# Altium PCB SPT3G_LCTestBoard.PcbDoc (part 3 of 3)
Units mil, origin at the board's own origin, x right, y up, seen from the top; angles counter-clockwise.
Board outline 4083.5 x 1969 mil, 6 copper layers (Top Layer, Signal Layer 1, Internal Plane 1, Internal Plane 2, Signal Layer 2, Bottom Layer), stack 61.6 mil thick; 146 components, 265 nets, 634 pads, 264 vias.
Unrouted connection lines stored in the file: 59.
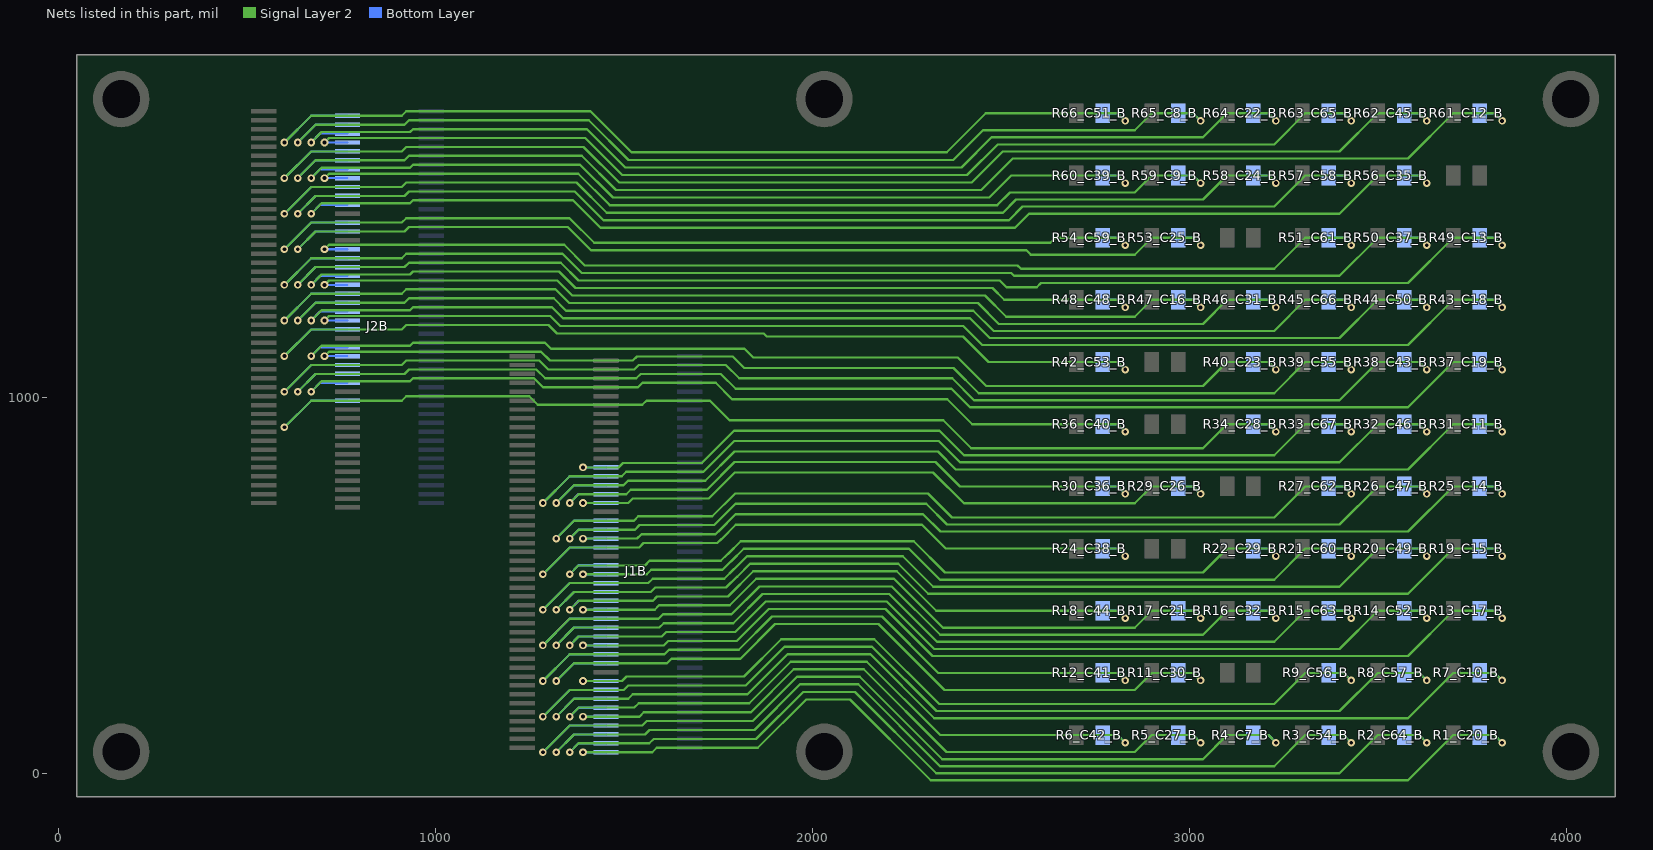
[diagram p7: the nets of this part, all layers, seen from the top]

## Via types
v1: diameter 20, hole 10, Top Layer to Bottom Layer, 264 vias

## Nets (pads, with @x,y where several pads share a name; then routed paths per layer and width w, separated by ;. In a path a pad name is that pad's centre, name@x,y a point inside that pad or via, vN(x,y) a via of type N, cw(c..) or ccw(c..) an arc to the next point about the centre after c; other vN are vias at no path point) (continued)
RETFREQB7: J1B.7 R4_C7_B.2 | length 2418.1
  Signal Layer 2 w6: v1(1284.57,57.68) 1355.43,128.54 1548.21,128.54 1560.02,140.36 1841.18,140.36 1958.59,257.77 1980,257.77 2125.56,257.77 2343.95,39.38 2615,39.38 3036.25,39.38 3100,103.13 3209.85,103.13 v1(3229.85,83.13)
  Bottom Layer w6: v1(1284.57,57.68) 1355.43,128.54 J1B.7@1451.89,128.54 ; R4_C7_B.2@3170,103.13 3209.85,103.13 v1(3229.85,83.13)
RETFREQB8: J2B.87 R65_C8_B.2 | length 2743
  Signal Layer 2 w6: v1(634.01,1675.79) 681.26,1723.03 917.36,1723.03 929.17,1734.84 1406.35,1734.84 1511.64,1629.56 1980,1629.56 2373.76,1629.56 2452.33,1708.13 2645,1708.13 2855,1708.13 2900,1753.13 3009.85,1753.13 v1(3029.85,1733.13)
  Bottom Layer w6: v1(634.01,1675.79) 681.26,1723.03 J2B.87@765.9,1723.03 ; R65_C8_B.2@2970,1753.13 3009.85,1753.13 v1(3029.85,1733.13)
RETFREQB9: J2B.75 R59_C9_B.2 | length 2534.5
  Signal Layer 2 w6: v1(704.88,1581.3) 716.69,1593.11 1378.38,1593.11 1461.93,1509.56 1980,1509.56 2490.35,1509.56 2523.91,1543.13 2645,1543.13 2855,1543.13 2900,1588.13 3009.85,1588.13 v1(3029.85,1568.13)
  Bottom Layer w6: v1(704.88,1581.3) J2B.75@765.9,1581.3 ; R59_C9_B.2@2970,1588.13 3009.85,1588.13 v1(3029.85,1568.13)
RETFREQB10: J1B.13 R7_C10_B.2 | length 2926.3
  Signal Layer 2 w6: v1(1320,152.17) 1367.24,199.41 1511.31,199.41 1523.12,211.22 1827.19,211.22 1933.74,317.77 1980,317.77 2153.72,317.77 2323.36,148.13 2606,148.13 3580,148.13 3700,268.13 3809.85,268.13 v1(3829.85,248.13)
  Bottom Layer w6: v1(1320,152.17) 1367.24,199.41 J1B.13@1451.89,199.41 ; R7_C10_B.2@3770,268.13 3809.85,268.13 v1(3829.85,248.13)
RETFREQB11: J1B.61 R31_C11_B.2 | length 2863.6
  Signal Layer 2 w6: v1(1320,719.1) 1367.24,766.34 1498.4,766.34 1510.21,778.15 1715.3,778.15 1792.72,855.57 1980,855.57 2332.88,855.57 2380.32,808.13 2606,808.13 3580,808.13 3700,928.13 3809.85,928.13 v1(3829.85,908.13)
  Bottom Layer w6: v1(1320,719.1) 1367.24,766.34 J1B.61@1451.89,766.34 ; R31_C11_B.2@3770,928.13 3809.85,928.13 v1(3829.85,908.13)
RETFREQB12: J2B.79 R61_C12_B.2 | length 3570.1
  Signal Layer 2 w6: v1(634.01,1581.3) 681.26,1628.54 917.36,1628.54 929.17,1640.36 1387.71,1640.36 1478.5,1549.56 1980,1549.56 2447.59,1549.56 2531.15,1633.13 2606,1633.13 3580,1633.13 3700,1753.13 3809.85,1753.13 v1(3829.85,1733.13)
  Bottom Layer w6: v1(634.01,1581.3) 681.26,1628.54 J2B.79@765.9,1628.54 ; R61_C12_B.2@3770,1753.13 3809.85,1753.13 v1(3829.85,1733.13)
RETFREQB13: J2B.55 R49_C13_B.2 | length 3529.5
  Signal Layer 2 w6: v1(634.01,1297.84) 681.26,1345.08 917.36,1345.08 929.17,1356.89 1331.76,1356.89 1379.09,1309.56 1980,1309.56 2496.89,1309.56 2514.61,1291.84 2594.71,1291.84 2606,1303.13 3580,1303.13 3700,1423.13 3809.85,1423.13 v1(3829.85,1403.13)
  Bottom Layer w6: v1(634.01,1297.84) 681.26,1345.08 J2B.55@765.9,1345.08 ; R49_C13_B.2@3770,1423.13 3809.85,1423.13 v1(3829.85,1403.13)
RETFREQB14: J1B.49 R25_C14_B.2 | length 2671.8
  Signal Layer 2 w6: v1(1390.86,624.61) 1534.11,624.61 1545.92,636.42 1742.67,636.42 1749.91,643.66 1750.52,643.66 1795.89,689.03 1980,689.03 2293.41,689.03 2339.32,643.13 2606,643.13 3580,643.13 3700,763.13 3809.85,763.13 v1(3829.85,743.13)
  Bottom Layer w6: v1(1390.86,624.61) J1B.49@1451.89,624.61 ; R25_C14_B.2@3770,763.13 3809.85,763.13 v1(3829.85,743.13)
RETFREQB15: J1B.37 R19_C15_B.2 | length 2871
  Signal Layer 2 w6: v1(1320,435.63) 1367.24,482.88 1570.7,482.88 1582.51,494.69 1770.64,494.69 1799.62,523.66 1800.23,523.66 1834.33,557.77 1980,557.77 2227.67,557.77 2307.31,478.13 2606,478.13 3580,478.13 3700,598.13 3809.85,598.13 v1(3829.85,578.13)
  Bottom Layer w6: v1(1320,435.63) 1367.24,482.88 J1B.37@1451.89,482.88 ; R19_C15_B.2@3770,598.13 3809.85,598.13 v1(3829.85,578.13)
RETFREQB16: J2B.51 R47_C16_B.2 | length 2525.9
  Signal Layer 2 w6: v1(704.88,1297.84) 716.69,1309.65 1322.44,1309.65 1362.52,1269.56 1980,1269.56 2457.73,1269.56 2514.16,1213.13 2645,1213.13 2855,1213.13 2900,1258.13 3009.85,1258.13 v1(3029.85,1238.13)
  Bottom Layer w6: v1(704.88,1297.84) J2B.51@765.9,1297.84 ; R47_C16_B.2@2970,1258.13 3009.85,1258.13 v1(3029.85,1238.13)
RETFREQB17: J1B.25 R13_C17_B.2 | length 2717.8
  Signal Layer 2 w6: v1(1390.86,341.14) 1605.41,341.14 1617.22,352.95 1799.22,352.95 1884.04,437.77 1980,437.77 2193.84,437.77 2318.48,313.13 2606,313.13 3580,313.13 3700,433.13 3809.85,433.13 v1(3829.85,413.13)
  Bottom Layer w6: v1(1390.86,341.14) J1B.25@1451.89,341.14 ; R13_C17_B.2@3770,433.13 3809.85,433.13 v1(3829.85,413.13)
RETFREQB18: J2B.43 R43_C18_B.2 | length 4100.4
  Signal Layer 2 w6: v1(704.88,1203.35) 716.69,1215.16 1303.79,1215.16 1330.31,1188.64 1500.57,1188.64 1806.24,1188.78 ; 1500.79,1188.86 1707.47,1188.86 1806.24,1188.78 ; 1707.69,1188.64 1980,1188.64 ; 1980,1188.86 1806.24,1188.78 ; v1(3829.85,1238.13) 3809.85,1258.13 3700,1258.13 3580,1138.13 2606,1138.13 2450.63,1138.13 2400.11,1188.64 1980,1188.64 ; 1806.24,1188.78 1980,1188.64
  Bottom Layer w6: v1(704.88,1203.35) J2B.43@765.9,1203.35 ; R43_C18_B.2@3770,1258.13 3809.85,1258.13 v1(3829.85,1238.13)
RETFREQB19: J2B.31 R37_C19_B.2 | length 3549.2
  Signal Layer 2 w6: v1(634.01,1014.37) 681.26,1061.62 917.36,1061.62 929.17,1073.43 1266.83,1073.43 1290.46,1049.8 1532.35,1049.8 1544.16,1061.62 1756.56,1061.62 1796.07,1022.1 1980,1022.1 2368.74,1022.1 2417.72,973.13 2606,973.13 3580,973.13 3700,1093.13 3809.85,1093.13 v1(3829.85,1073.13)
  Bottom Layer w6: v1(634.01,1014.37) 681.26,1061.62 J2B.31@765.9,1061.62 ; R37_C19_B.2@3770,1093.13 3809.85,1093.13 v1(3829.85,1073.13)
RETFREQB20: J1B.1 R1_C20_B.2 | length 2773.1
  Signal Layer 2 w6: v1(1390.86,57.68) 1574.73,57.68 1586.29,69.24 1854.92,69.24 1983.45,197.77 2099.2,197.77 2313.84,-16.87 3580,-16.87 3700,103.13 3809.85,103.13 v1(3829.85,83.13)
  Bottom Layer w6: v1(1390.86,57.68) J1B.1@1451.89,57.68 ; R1_C20_B.2@3770,103.13 3809.85,103.13 v1(3829.85,83.13)
RETFREQB21: J1B.33 R17_C21_B.2 | length 1882.8
  Signal Layer 2 w6: v1(1390.86,435.63) 1581.05,435.63 1592.86,447.44 1780.57,447.44 1850.9,517.77 1980,517.77 2216.39,517.77 2346.03,388.13 2645,388.13 2855,388.13 2900,433.13 3009.85,433.13 v1(3029.85,413.13)
  Bottom Layer w6: v1(1390.86,435.63) J1B.33@1451.89,435.63 ; R17_C21_B.2@2970,433.13 3009.85,433.13 v1(3029.85,413.13)
RETFREQB22: J2B.85 R64_C22_B.2 | length 2859.3
  Signal Layer 2 w6: v1(669.45,1675.79) 697.01,1703.35 931.79,1703.35 939.67,1711.22 1401.69,1711.22 1503.35,1609.56 1980,1609.56 2395.14,1609.56 2474.96,1689.38 2615,1689.38 3036.25,1689.38 3100,1753.13 3209.85,1753.13 v1(3229.85,1733.13)
  Bottom Layer w6: v1(669.45,1675.79) 693.07,1699.41 J2B.85@765.9,1699.41 ; R64_C22_B.2@3170,1753.13 3209.85,1753.13 v1(3229.85,1733.13)
RETFREQB23: J2B.37 R40_C23_B.2 | length 2831.7
  Signal Layer 2 w6: v1(669.45,1108.86) 697.01,1136.42 931.79,1136.42 939.67,1144.29 1290.12,1144.29 1305.77,1128.64 1819.55,1128.64 1842.82,1105.37 1980,1105.37 2385.33,1105.37 2461.32,1029.38 2615,1029.38 3036.25,1029.38 3100,1093.13 3209.85,1093.13 v1(3229.85,1073.13)
  Bottom Layer w6: v1(669.45,1108.86) 693.07,1132.48 J2B.37@765.9,1132.48 ; R40_C23_B.2@3170,1093.13 3209.85,1093.13 v1(3229.85,1073.13)
RETFREQB24: J2B.73 R58_C24_B.2 | length 3012.5
  Signal Layer 2 w6: v1(598.58,1486.81) 669.45,1557.68 910.13,1557.68 921.94,1569.49 1373.72,1569.49 1453.65,1489.56 1980,1489.56 2505.43,1489.56 2540.25,1524.38 2615,1524.38 3036.25,1524.38 3100,1588.13 3209.85,1588.13 v1(3229.85,1568.13)
  Bottom Layer w6: v1(598.58,1486.81) 669.45,1557.68 J2B.73@765.9,1557.68 ; R58_C24_B.2@3170,1588.13 3209.85,1588.13 v1(3229.85,1568.13)
RETFREQB25: J2B.63 R53_C25_B.2 | length 2697.2
  Signal Layer 2 w6: v1(634.01,1392.32) 681.26,1439.57 917.36,1439.57 929.17,1451.38 1350.41,1451.38 1412.22,1389.56 1980,1389.56 2568.02,1389.56 2579.45,1378.13 2645,1378.13 2855,1378.13 2900,1423.13 3009.85,1423.13 v1(3029.85,1403.13)
  Bottom Layer w6: v1(634.01,1392.32) 681.26,1439.57 J2B.63@765.9,1439.57 ; R53_C25_B.2@2970,1423.13 3009.85,1423.13 v1(3029.85,1403.13)
RETFREQB26: J1B.57 R29_C26_B.2 | length 1862.5
  Signal Layer 2 w6: v1(1390.86,719.1) 1511.22,719.1 1523.03,730.91 1724.63,730.91 1793.78,800.06 1980,800.06 2320.02,800.06 2401.95,718.13 2645,718.13 2855,718.13 2900,763.13 3009.85,763.13 v1(3029.85,743.13)
  Bottom Layer w6: v1(1390.86,719.1) J1B.57@1451.89,719.1 ; R29_C26_B.2@2970,763.13 3009.85,763.13 v1(3029.85,743.13)
RETFREQB27: J1B.9 R5_C27_B.2 | length 1938.1
  Signal Layer 2 w6: v1(1390.86,152.17) 1540.6,152.17 1552.41,163.98 1836.52,163.98 1950.31,277.77 1980,277.77 2136.14,277.77 2355.79,58.13 2645,58.13 2855,58.13 2900,103.13 3009.85,103.13 v1(3029.85,83.13)
  Bottom Layer w6: v1(1390.86,152.17) J1B.9@1451.89,152.17 ; R5_C27_B.2@2970,103.13 3009.85,103.13 v1(3029.85,83.13)
RETFREQB28: J2B.25 R34_C28_B.2 | length 3031.6
  Signal Layer 2 w6: v1(598.58,919.88) 669.45,990.75 910.13,990.75 921.94,1002.56 1247.94,1002.56 1270.98,979.52 1548.24,979.52 1559.47,990.75 1727.84,990.75 1779.75,938.84 1980,938.84 2346.76,938.84 2421.22,864.38 2615,864.38 3036.25,864.38 3100,928.13 3209.85,928.13 v1(3229.85,908.13)
  Bottom Layer w6: v1(598.58,919.88) 669.45,990.75 J2B.25@765.9,990.75 ; R34_C28_B.2@3170,928.13 3209.85,928.13 v1(3229.85,908.13)
RETFREQB29: J1B.43 R22_C29_B.2 | length 2154.3
  Signal Layer 2 w6: v1(1355.43,530.12) 1378.54,553.23 1555.23,553.23 1567.55,565.55 1756.65,565.55 1774.77,583.66 1775.37,583.66 1809.48,617.77 1980,617.77 2268.42,617.77 2351.81,534.38 2615,534.38 3036.25,534.38 3100,598.13 3209.85,598.13 v1(3229.85,578.13)
  Bottom Layer w6: v1(1355.43,530.12) 1379.05,553.74 J1B.43@1451.89,553.74 ; R22_C29_B.2@3170,598.13 3209.85,598.13 v1(3229.85,578.13)
RETFREQB30: J1B.21 R11_C30_B.2 | length 2091.3
  Signal Layer 2 w6: v1(1320,246.66) 1367.24,293.9 1614,293.9 1625.81,305.71 1808.55,305.71 1900.6,397.77 1980,397.77 2175.37,397.77 2350.01,223.13 2645,223.13 2855,223.13 2900,268.13 3009.85,268.13 v1(3029.85,248.13)
  Bottom Layer w6: v1(1320,246.66) 1367.24,293.9 J1B.21@1451.89,293.9 ; R11_C30_B.2@2970,268.13 3009.85,268.13 v1(3029.85,248.13)
RETFREQB31: J2B.49 R46_C31_B.2 | length 3003
  Signal Layer 2 w6: v1(598.58,1203.35) 669.45,1274.21 910.13,1274.21 921.94,1286.02 1317.77,1286.02 1354.24,1249.56 1980,1249.56 2439.04,1249.56 2494.23,1194.38 2615,1194.38 3036.25,1194.38 3100,1258.13 3209.85,1258.13 v1(3229.85,1238.13)
  Bottom Layer w6: v1(598.58,1203.35) 669.45,1274.21 J2B.49@765.9,1274.21 ; R46_C31_B.2@3170,1258.13 3209.85,1258.13 v1(3229.85,1238.13)
RETFREQB32: J1B.31 R16_C32_B.2 | length 2362.8
  Signal Layer 2 w6: v1(1284.57,341.14) 1355.31,411.88 1591.19,411.88 1603.06,423.76 1785.17,423.76 1859.18,497.77 1980,497.77 2210.3,497.77 2338.7,369.38 2615,369.38 3036.25,369.38 3100,433.13 3209.85,433.13 v1(3229.85,413.13)
  Bottom Layer w6: v1(1284.57,341.14) 1355.43,412.01 J1B.31@1451.89,412.01 ; R16_C32_B.2@3170,433.13 3209.85,433.13 v1(3229.85,413.13)
RETFREQB35: J2B.69 R56_C35_B.2 | length 3245.2
  Signal Layer 2 w6: v1(669.45,1486.81) 697.01,1514.37 931.79,1514.37 939.67,1522.25 1364.39,1522.25 1437.08,1449.56 1980,1449.56 2537.4,1449.56 2574.71,1486.88 2605,1486.88 3398.75,1486.88 3500,1588.13 3609.85,1588.13 v1(3629.85,1568.13)
  Bottom Layer w6: v1(669.45,1486.81) 693.07,1510.43 J2B.69@765.9,1510.43 ; R56_C35_B.2@3570,1588.13 3609.85,1588.13 v1(3629.85,1568.13)
RETFREQB36: J1B.59 R30_C36_B.2 | length 1728.9
  Signal Layer 2 w6: v1(1355.43,719.1) 1378.95,742.61 1505.84,742.61 1517.76,754.53 1719.97,754.53 1793.25,827.81 1980,827.81 2326.45,827.81 2391.13,763.13 2645,763.13 2809.85,763.13 v1(2829.85,743.13)
  Bottom Layer w6: v1(1355.43,719.1) 1379.05,742.72 J1B.59@1451.89,742.72 ; R30_C36_B.2@2770,763.13 2809.85,763.13 v1(2829.85,743.13)
RETFREQB37: J2B.57 R50_C37_B.2 | length 3404.8
  Signal Layer 2 w6: v1(598.58,1297.84) 669.45,1368.7 910.13,1368.7 921.94,1380.51 1336.42,1380.51 1387.37,1329.56 1980,1329.56 2527.26,1329.56 2534.95,1321.88 2605,1321.88 3398.75,1321.88 3500,1423.13 3609.85,1423.13 v1(3629.85,1403.13)
  Bottom Layer w6: v1(598.58,1297.84) 669.45,1368.7 J2B.57@765.9,1368.7 ; R50_C37_B.2@3570,1423.13 3609.85,1423.13 v1(3629.85,1403.13)
RETFREQB38: J1B.47 R24_C38_B.2 | length 1898.9
  Signal Layer 2 w6: v1(1284.56,530.12) 1355.43,600.99 1539.9,600.99 1551.71,612.8 1747.33,612.8 1758.2,623.66 1758.8,623.66 1796.42,661.28 1980,661.28 2290.58,661.28 2353.73,598.13 2645,598.13 2809.85,598.13 v1(2829.85,578.13)
  Bottom Layer w6: v1(1284.56,530.12) 1355.43,600.99 J1B.47@1451.89,600.99 ; R24_C38_B.2@2770,598.13 2809.85,598.13 v1(2829.85,578.13)
RETFREQB39: J2B.77 R60_C39_B.2 | length 2418.1
  Signal Layer 2 w6: v1(669.45,1581.3) 697.01,1608.86 931.79,1608.86 939.67,1616.73 1383.04,1616.73 1470.21,1529.56 1980,1529.56 2468.97,1529.56 2527.53,1588.13 2645,1588.13 2809.85,1588.13 v1(2829.85,1568.13)
  Bottom Layer w6: v1(669.45,1581.3) 693.07,1604.92 J2B.77@765.9,1604.92 ; R60_C39_B.2@2770,1588.13 2809.85,1588.13 v1(2829.85,1568.13)
RETFREQB40: J2B.29 R36_C40_B.2 | length 2418
  Signal Layer 2 w6: v1(669.45,1014.37) 697.01,1041.93 931.79,1041.93 939.67,1049.8 1261.04,1049.8 1284.74,1026.1 1536.74,1026.1 1548.63,1037.99 1742.88,1037.99 1786.53,994.35 1980,994.35 2357.82,994.35 2424.04,928.13 2645,928.13 2809.85,928.13 v1(2829.85,908.13)
  Bottom Layer w6: v1(669.45,1014.37) 693.07,1037.99 J2B.29@765.9,1037.99 ; R36_C40_B.2@2770,928.13 2809.85,928.13 v1(2829.85,908.13)
RETFREQB41: J1B.23 R12_C41_B.2 | length 1951.2
  Signal Layer 2 w6: v1(1284.57,246.66) 1355.43,317.52 1607.27,317.52 1619.08,329.33 1803.88,329.33 1892.32,417.77 1980,417.77 2184.15,417.77 2333.8,268.13 2645,268.13 2809.85,268.13 v1(2829.85,248.13)
  Bottom Layer w6: v1(1284.57,246.66) 1355.43,317.52 J1B.23@1451.89,317.52 ; R12_C41_B.2@2770,268.13 2809.85,268.13 v1(2829.85,248.13)
RETFREQB42: J1B.11 R6_C42_B.2 | length 1798
  Signal Layer 2 w6: v1(1355.43,152.17) 1379.34,176.08 1527.14,176.08 1538.66,187.6 1831.86,187.6 1942.03,297.77 1980,297.77 2144.03,297.77 2338.67,103.13 2645,103.13 2809.85,103.13 v1(2829.85,83.13)
  Bottom Layer w6: v1(1355.43,152.17) 1379.05,175.79 J1B.11@1451.89,175.79 ; R6_C42_B.2@2770,103.13 2809.85,103.13 v1(2829.85,83.13)
RETFREQB43: J2B.33 R38_C43_B.2 | length 3433.9
  Signal Layer 2 w6: v1(598.58,1014.37) 669.45,1085.24 910.13,1085.24 921.94,1097.05 1275.03,1097.05 1298.65,1073.43 1527.08,1073.43 1538.89,1085.24 1769.88,1085.24 1805.25,1049.86 1980,1049.86 2370.67,1049.86 2428.66,991.88 2605,991.88 3398.75,991.88 3500,1093.13 3609.85,1093.13 v1(3629.85,1073.13)
  Bottom Layer w6: v1(598.58,1014.37) 669.45,1085.24 J2B.33@765.9,1085.24 ; R38_C43_B.2@3570,1093.13 3609.85,1093.13 v1(3629.85,1073.13)
RETFREQB44: J1B.35 R18_C44_B.2 | length 1742.4
  Signal Layer 2 w6: v1(1355.43,435.63) 1379.56,459.76 ; 1379.77,459.97 1576.42,459.97 1587.57,471.12 1775.97,471.12 1842.61,537.77 1980,537.77 2223.38,537.77 2328.02,433.13 2645,433.13 2809.85,433.13 v1(2829.85,413.13)
  Bottom Layer w6: v1(1355.43,435.63) 1379.05,459.25 J1B.35@1451.89,459.25 ; R18_C44_B.2@2770,433.13 2809.85,433.13 v1(2829.85,413.13)
RETFREQB45: J2B.81 R62_C45_B.2 | length 3453.8
  Signal Layer 2 w6: v1(598.58,1581.3) 669.45,1652.17 910.13,1652.17 921.94,1663.98 1392.37,1663.98 1486.78,1569.56 1980,1569.56 2422.61,1569.56 2504.92,1651.88 2605,1651.88 3398.75,1651.88 3500,1753.13 3609.85,1753.13 v1(3629.85,1733.13)
  Bottom Layer w6: v1(598.58,1581.3) 669.45,1652.17 J2B.81@765.9,1652.17 ; R62_C45_B.2@3570,1753.13 3609.85,1753.13 v1(3629.85,1733.13)
RETFREQB46: J1B.63 R32_C46_B.2 | length 2751.7
  Signal Layer 2 w6: v1(1284.57,719.1) 1355.43,789.96 1493.97,789.96 1505.78,801.77 1674.33,801.77 1710.64,801.77 1792.19,883.32 1980,883.32 2334.81,883.32 2391.25,826.88 2605,826.88 3398.75,826.88 3500,928.13 3609.85,928.13 v1(3629.85,908.13)
  Bottom Layer w6: v1(1284.57,719.1) 1355.43,789.96 J1B.63@1451.89,789.96 ; R32_C46_B.2@3570,928.13 3609.85,928.13 v1(3629.85,908.13)
RETFREQB47: J1B.51 R26_C47_B.2 | length 2559.9
  Signal Layer 2 w6: v1(1355.43,624.61) 1379.11,648.29 1528.74,648.29 1540.91,660.45 1739.02,660.45 1795.36,716.79 1980,716.79 2301.64,716.79 2356.55,661.88 2605,661.88 3398.75,661.88 3500,763.13 3609.85,763.13 v1(3629.85,743.13)
  Bottom Layer w6: v1(1355.43,624.61) 1379.05,648.23 J1B.51@1451.89,648.23 ; R26_C47_B.2@3570,763.13 3609.85,763.13 v1(3629.85,743.13)
RETFREQB48: J2B.53 R48_C48_B.2 | length 2388.9
  Signal Layer 2 w6: v1(669.45,1297.84) 697.01,1325.39 931.79,1325.39 939.67,1333.27 1327.1,1333.27 1370.8,1289.56 1980,1289.56 2477.31,1289.56 2508.74,1258.13 2645,1258.13 2809.85,1258.13 v1(2829.85,1238.13)
  Bottom Layer w6: v1(669.45,1297.84) 693.07,1321.46 J2B.53@765.9,1321.46 ; R48_C48_B.2@2770,1258.13 2809.85,1258.13 v1(2829.85,1238.13)
RETFREQB49: J1B.39 R20_C49_B.2 | length 2752.7
  Signal Layer 2 w6: v1(1284.57,435.63) 1355.43,506.5 1564.39,506.5 1576.2,518.31 1765.98,518.31 1791.33,543.66 1791.94,543.66 1826.05,577.77 1980,577.77 2239.15,577.77 2320.04,496.88 2605,496.88 3398.75,496.88 3500,598.13 3609.85,598.13 v1(3629.85,578.13)
  Bottom Layer w6: v1(1284.57,435.63) 1355.43,506.5 J1B.39@1451.89,506.5 ; R20_C49_B.2@3570,598.13 3609.85,598.13 v1(3629.85,578.13)
RETFREQB50: J2B.45 R44_C50_B.2 | length 3233.6
  Signal Layer 2 w6: v1(669.45,1203.35) 697.01,1230.91 931.79,1230.91 939.67,1238.78 1308.45,1238.78 1337.67,1209.56 1980,1209.56 2417.87,1209.56 2470.56,1156.88 2605,1156.88 3398.75,1156.88 3500,1258.13 3609.85,1258.13 v1(3629.85,1238.13)
  Bottom Layer w6: v1(669.45,1203.35) 693.07,1226.97 J2B.45@765.9,1226.97 ; R44_C50_B.2@3570,1258.13 3609.85,1258.13 v1(3629.85,1238.13)
RETFREQB51: J2B.89 R66_C51_B.2 | length 2626.6
  Signal Layer 2 w6: v1(598.58,1675.79) 669.45,1746.65 910.13,1746.65 921.94,1758.47 1411.02,1758.47 1519.92,1649.56 1980,1649.56 2355.98,1649.56 2459.54,1753.13 2645,1753.13 2809.85,1753.13 v1(2829.85,1733.13)
  Bottom Layer w6: v1(598.58,1675.79) 669.45,1746.65 J2B.89@765.9,1746.65 ; R66_C51_B.2@2770,1753.13 2809.85,1753.13 v1(2829.85,1733.13)
RETFREQB52: J1B.27 R14_C52_B.2 | length 2599.5
  Signal Layer 2 w6: v1(1355.43,341.14) 1379.23,364.95 1600.01,364.95 1611.79,376.73 1794.71,376.73 1875.75,457.77 1980,457.77 2197.23,457.77 2323.12,331.88 2605,331.88 3398.75,331.88 3500,433.13 3609.85,433.13 v1(3629.85,413.13)
  Bottom Layer w6: v1(1355.43,341.14) 1379.05,364.77 J1B.27@1451.89,364.77 ; R14_C52_B.2@3570,433.13 3609.85,433.13 v1(3629.85,413.13)
RETFREQB53: J2B.41 R42_C53_B.2 | length 2579.4
  Signal Layer 2 w6: v1(598.58,1108.86) 669.45,1179.73 910.13,1179.73 921.94,1191.54 1299.12,1191.54 1322.02,1168.64 1870.44,1168.64 1878.19,1160.88 1980,1160.88 2399.08,1160.88 2466.84,1093.13 2645,1093.13 2809.85,1093.13 v1(2829.85,1073.13)
  Bottom Layer w6: v1(598.58,1108.86) 669.45,1179.73 J2B.41@765.9,1179.73 ; R42_C53_B.2@2770,1093.13 2809.85,1093.13 v1(2829.85,1073.13)
RETFREQB54: J1B.5 R3_C54_B.2 | length 2536.4
  Signal Layer 2 w6: v1(1320,57.68) 1367.24,104.92 1555.44,104.92 1567.25,116.73 1845.84,116.73 1966.88,237.77 1980,237.77 2121.27,237.77 2338.41,20.63 2605,20.63 3225.18,20.63 3307.68,103.13 3409.85,103.13 v1(3429.85,83.13)
  Bottom Layer w6: v1(1320,57.68) 1367.24,104.92 J1B.5@1451.89,104.92 ; R3_C54_B.2@3370,103.13 3409.85,103.13 v1(3429.85,83.13)
RETFREQB55: J2B.35 R39_C55_B.2 | length 2956.2
  Signal Layer 2 w6: v1(704.88,1108.86) 716.69,1120.67 1279.63,1120.67 1303.25,1097.05 1522.93,1097.05 1534,1108.13 1788.52,1108.13 1819.03,1077.62 1980,1077.62 2374.4,1077.62 2441.39,1010.63 2605,1010.63 3225.18,1010.63 3307.68,1093.13 3409.85,1093.13 v1(3429.85,1073.13)
  Bottom Layer w6: v1(704.88,1108.86) J2B.35@765.9,1108.86 ; R39_C55_B.2@3370,1093.13 3409.85,1093.13 v1(3429.85,1073.13)
RETFREQB56: J1B.17 R9_C56_B.2 | length 2327.9
  Signal Layer 2 w6: v1(1390.86,246.66) 1494.56,246.66 1506.37,258.47 1817.87,258.47 1917.17,357.77 1980,357.77 2164.09,357.77 2336.24,185.63 2605,185.63 3225.18,185.63 3307.68,268.13 3409.85,268.13 v1(3429.85,248.13)
  Bottom Layer w6: v1(1390.86,246.66) J1B.17@1451.89,246.66 ; R9_C56_B.2@3370,268.13 3409.85,268.13 v1(3429.85,248.13)
RETFREQB57: J1B.15 R8_C57_B.2 | length 2808
  Signal Layer 2 w6: v1(1284.57,152.17) 1355.43,223.03 1499.11,223.03 1510.92,234.84 1822.53,234.84 1925.46,337.77 1980,337.77 2158.01,337.77 2328.9,166.88 2605,166.88 3398.75,166.88 3500,268.13 3609.85,268.13 v1(3629.85,248.13)
  Bottom Layer w6: v1(1284.57,152.17) 1355.43,223.03 J1B.15@1451.89,223.03 ; R8_C57_B.2@3570,268.13 3609.85,268.13 v1(3629.85,248.13)
RETFREQB58: J2B.71 R57_C58_B.2 | length 3128.9
  Signal Layer 2 w6: v1(634.01,1486.81) 681.26,1534.06 917.36,1534.06 929.17,1545.87 1369.06,1545.87 1445.36,1469.56 1980,1469.56 2521.42,1469.56 2557.48,1505.63 2605,1505.63 3225.18,1505.63 3307.68,1588.13 3409.85,1588.13 v1(3429.85,1568.13)
  Bottom Layer w6: v1(634.01,1486.81) 681.26,1534.06 J2B.71@765.9,1534.06 ; R57_C58_B.2@3370,1588.13 3409.85,1588.13 v1(3429.85,1568.13)
RETFREQB59: J2B.65 R54_C59_B.2 | length 2571.3
  Signal Layer 2 w6: v1(598.58,1392.32) 669.45,1463.19 910.13,1463.19 921.94,1475 1355.07,1475 1420.51,1409.56 1980,1409.56 2631.44,1409.56 2645,1423.13 2809.85,1423.13 v1(2829.85,1403.13)
  Bottom Layer w6: v1(598.58,1392.32) 669.45,1463.19 J2B.65@765.9,1463.19 ; R54_C59_B.2@2770,1423.13 2809.85,1423.13 v1(2829.85,1403.13)
RETFREQB60: J1B.41 R21_C60_B.2 | length 2272.6
  Signal Layer 2 w6: v1(1390.86,530.12) 1560.2,530.12 1572.01,541.93 1761.32,541.93 1783.05,563.66 1783.66,563.66 1817.76,597.77 1980,597.77 2256.04,597.77 2338.18,515.63 2605,515.63 3225.18,515.63 3307.68,598.13 3409.85,598.13 v1(3429.85,578.13)
  Bottom Layer w6: v1(1390.86,530.12) J1B.41@1451.89,530.12 ; R21_C60_B.2@3370,598.13 3409.85,598.13 v1(3429.85,578.13)
RETFREQB61: J2B.59 R51_C61_B.2 | length 2927.8
  Signal Layer 2 w6: v1(704.88,1392.32) 716.69,1404.14 1341.08,1404.14 1395.66,1349.56 1980,1349.56 2544.15,1349.56 2553.08,1340.63 3225.18,1340.63 3307.68,1423.13 3409.85,1423.13 v1(3429.85,1403.13)
  Bottom Layer w6: v1(704.88,1392.32) J2B.59@765.9,1392.32 ; R51_C61_B.2@3370,1423.13 3409.85,1423.13 v1(3429.85,1403.13)
RETFREQB62: J1B.53 R27_C62_B.2 | length 2448.1
  Signal Layer 2 w6: v1(1320,624.61) 1367.24,671.85 1525.99,671.85 1537.8,683.66 1733.95,683.66 1794.83,744.54 1980,744.54 2306.27,744.54 2370.18,680.63 2605,680.63 3225.18,680.63 3307.68,763.13 3409.85,763.13 v1(3429.85,743.13)
  Bottom Layer w6: v1(1320,624.61) 1367.24,671.85 J1B.53@1451.89,671.85 ; R27_C62_B.2@3370,763.13 3409.85,763.13 v1(3429.85,743.13)
RETFREQB63: J1B.29 R15_C63_B.2 | length 2481.2
  Signal Layer 2 w6: v1(1320,341.14) 1367.24,388.39 1593.1,388.39 1604.91,400.2 1789.9,400.2 1867.47,477.77 1980,477.77 2203.32,477.77 2330.46,350.63 2605,350.63 3225.18,350.63 3307.68,433.13 3409.85,433.13 v1(3429.85,413.13)
  Bottom Layer w6: v1(1320,341.14) 1367.24,388.39 J1B.29@1451.89,388.39 ; R15_C63_B.2@3370,433.13 3409.85,433.13 v1(3429.85,413.13)
RETFREQB64: J1B.3 R2_C64_B.2 | length 2654.7
  Signal Layer 2 w6: v1(1355.43,57.68) 1379,81.25 1566.99,81.25 1578.54,92.8 1850.2,92.8 1975.16,217.77 1980,217.77 2112.48,217.77 2328.38,1.88 2605,1.88 3398.75,1.88 3500,103.13 3609.85,103.13 v1(3629.85,83.13)
  Bottom Layer w6: v1(1355.43,57.68) 1379.05,81.3 J1B.3@1451.89,81.3 ; R2_C64_B.2@3570,103.13 3609.85,103.13 v1(3629.85,83.13)
RETFREQB65: J2B.83 R63_C65_B.2 | length 2975.7
  Signal Layer 2 w6: v1(704.88,1675.79) 716.69,1687.6 1397.03,1687.6 1495.07,1589.56 1980,1589.56 2410.23,1589.56 2491.29,1670.63 2605,1670.63 3225.18,1670.63 3307.68,1753.13 3409.85,1753.13 v1(3429.85,1733.13)
  Bottom Layer w6: v1(704.88,1675.79) J2B.83@765.9,1675.79 ; R63_C65_B.2@3370,1753.13 3409.85,1753.13 v1(3429.85,1733.13)
RETFREQB66: J2B.47 R45_C66_B.2 | length 3118.3
  Signal Layer 2 w6: v1(634.01,1203.35) 681.26,1250.59 917.36,1250.59 929.17,1262.4 1313.11,1262.4 1345.95,1229.56 1980,1229.56 2426.66,1229.56 2480.6,1175.63 2605,1175.63 3225.18,1175.63 3307.68,1258.13 3409.85,1258.13 v1(3429.85,1238.13)
  Bottom Layer w6: v1(634.01,1203.35) 681.26,1250.59 J2B.47@765.9,1250.59 ; R45_C66_B.2@3370,1258.13 3409.85,1258.13 v1(3429.85,1238.13)
RETFREQB67: J1B.65 R33_C67_B.2 | length 2278.1
  Signal Layer 2 w6: v1(1390.86,813.58) 1485.29,813.58 1497.11,825.4 1705.98,825.4 1791.66,911.08 1980,911.08 2336.74,911.08 2402.19,845.63 2605,845.63 3225.18,845.63 3307.68,928.13 3409.85,928.13 v1(3429.85,908.13)
  Bottom Layer w6: v1(1390.86,813.58) J1B.65@1451.89,813.58 ; R33_C67_B.2@3370,928.13 3409.85,928.13 v1(3429.85,908.13)
pads on no net: J1A.2@482.44,1849.02 J1A.67 J1A.68 J1A.69 J1A.70 J1A.71 J1A.72 J1A.73 J1A.74 J1A.75 J1A.76 J1A.77 J1A.78 J1A.79 J1A.80 J1A.81 J1A.82 J1A.83 J1A.84 J1A.85 J1A.86 J1A.87 J1A.88 J1A.89 J1A.90 J1B.2@1390.86,-32.87 J1B.67 J1B.68 J1B.69 J1B.70 J1B.71 J1B.72 J1B.73 J1B.74 J1B.75 J1B.76 J1B.77 J1B.78 J2A.2@1168.42,1199.41 J2A.13 J2A.14 J2A.15 J2A.16 J2A.17 J2A.18 J2A.19 J2A.20 J2A.21 J2A.22 J2A.23 J2A.24 J2B.1 J2B.2 J2B.3 J2B.4 J2B.5 J2B.6 J2B.7 J2B.8 J2B.9 J2B.10 J2B.11 J2B.12 J2B.13 J2B.14 J2B.15 J2B.16 J2B.17 J2B.18 J2B.19 J2B.20 J2B.21 J2B.22 J2B.23 J2B.24

## Polygon pours and split planes (outlines as drawn)
GND on Internal Plane 1 (split plane): 4110.49,-39.94 67.18,-39.94 67.18,1888.87 4110.49,1888.87
GND on Internal Plane 2 (split plane): 4110.49,-39.94 67.18,-39.94 67.18,1888.87 4110.49,1888.87

## Keep-outs
Keep-Out Layer:
  lines w1: 82.08,2136.91 1332.71,3387.55 ; 82.08,2196.91 1272.71,3387.55 ; 82.08,2256.91 1212.71,3387.55 ; 82.08,2316.91 1152.71,3387.55 ; 82.08,2376.91 1092.71,3387.55 ; 82.08,2436.91 1032.71,3387.55 ; 82.08,2496.91 972.71,3387.55 ; 82.08,2556.91 912.71,3387.55 ; 82.08,2616.91 852.71,3387.55 ; 82.08,2676.91 792.71,3387.55 ; 82.08,2736.91 732.71,3387.55 ; 82.08,2796.91 672.71,3387.55 ; 82.08,2856.91 612.71,3387.55 ; 82.08,2916.91 552.71,3387.55 ; 82.08,2976.91 492.71,3387.55 ; 82.08,3036.91 432.71,3387.55 ; 82.08,3096.91 372.71,3387.55 ; 82.08,3156.91 312.71,3387.55 ; 82.08,3216.91 252.71,3387.55 ; 82.08,3276.91 192.71,3387.55 ; 82.08,3336.91 132.71,3387.55 ; 110.3,2105.14 1392.71,3387.55 ; 170.3,2105.14 1452.71,3387.55 ; 230.3,2105.14 1512.71,3387.55 ; 290.3,2105.14 1572.71,3387.55 ; 350.3,2105.14 1632.71,3387.55 ; 410.3,2105.14 1692.71,3387.55 ; 470.3,2105.14 1752.71,3387.55 ; 530.3,2105.14 1812.71,3387.55 ; 590.3,2105.14 1872.71,3387.55 ; 650.3,2105.14 1932.71,3387.55 ; 710.3,2105.14 1992.71,3387.55 ; 770.3,2105.14 2052.71,3387.55 ; 830.3,2105.14 2112.71,3387.55 ; 890.3,2105.14 2172.71,3387.55 ; 950.3,2105.14 2232.71,3387.55 ; 1010.3,2105.14 2292.71,3387.55 ; 1070.3,2105.14 2352.71,3387.55 ; 1130.3,2105.14 2412.71,3387.55 ; 1190.3,2105.14 2472.71,3387.55 ; 1250.3,2105.14 2532.71,3387.55 ; 1310.3,2105.14 2592.71,3387.55 ; 1370.3,2105.14 2652.71,3387.55 ; 1430.3,2105.14 2712.71,3387.55 ; 1490.3,2105.14 2772.71,3387.55 ; 1550.3,2105.14 2832.71,3387.55 ; 1610.3,2105.14 2892.71,3387.55 ; 1670.3,2105.14 2952.71,3387.55 ; 1730.3,2105.14 3012.71,3387.55 ; 1790.3,2105.14 3072.71,3387.55 ; 1850.3,2105.14 3132.71,3387.55 ; 1910.3,2105.14 3192.71,3387.55 ; 1970.3,2105.14 3252.71,3387.55 ; 2030.3,2105.14 3312.71,3387.55 ; 2090.3,2105.14 3372.71,3387.55 ; 2150.3,2105.14 3432.71,3387.55 ; 2210.3,2105.14 3492.71,3387.55 ; 2270.3,2105.14 3552.71,3387.55 ; 2330.3,2105.14 3612.71,3387.55 ; 2390.3,2105.14 3672.71,3387.55 ; 2450.3,2105.14 3732.71,3387.55 ; 2510.3,2105.14 3792.71,3387.55 ; 2570.3,2105.14 3852.71,3387.55 ; 2630.3,2105.14 3912.71,3387.55 ; 2690.3,2105.14 3972.71,3387.55 ; 2750.3,2105.14 4032.71,3387.55 ; 2810.3,2105.14 4092.71,3387.55 ; 2870.3,2105.14 4152.71,3387.55 ; 2930.3,2105.14 4212.71,3387.55 ; 2990.3,2105.14 4272.71,3387.55 ; 3050.3,2105.14 4332.71,3387.55 ; 3110.3,2105.14 4392.71,3387.55 ; 3170.3,2105.14 4452.71,3387.55 ; 3230.3,2105.14 4512.71,3387.55 ; 3290.3,2105.14 4572.71,3387.55 ; 3350.3,2105.14 4632.71,3387.55 ; 3410.3,2105.14 4692.71,3387.55 ; 3470.3,2105.14 4730.84,3365.68 ; 3530.3,2105.14 4730.84,3305.68 ; 3590.3,2105.14 4730.84,3245.68 ; 3611.16,3437.32 3710.84,3537 3830.84,3657 3950.84,3777 4070.84,3897 4190.84,4017 4310.84,4137 4430.84,4257 4550.84,4377 4670.84,4497 4730.84,4557 ; 3611.16,3497.32 3650.84,3537 3770.84,3657 3890.84,3777 4010.84,3897 4130.84,4017 4250.84,4137 4370.84,4257 4490.84,4377 4610.84,4497 4730.84,4617 ; 3611.16,3557.32 3710.84,3657 3830.84,3777 3950.84,3897 4070.84,4017 4190.84,4137 4310.84,4257 4430.84,4377 4550.84,4497 4670.84,4617 4730.84,4677 ; 3611.16,3617.32 3650.84,3657 3770.84,3777 3890.84,3897 4010.84,4017 4130.84,4137 4250.84,4257 4370.84,4377 4490.84,4497 4610.84,4617 4730.84,4737 ; 3611.16,3677.32 3710.84,3777 3830.84,3897 3950.84,4017 4070.84,4137 4190.84,4257 4310.84,4377 4430.84,4497 4550.84,4617 4670.84,4737 4730.84,4797 ; 3611.16,3737.32 3650.84,3777 3770.84,3897 3890.84,4017 4010.84,4137 4130.84,4257 4250.84,4377 4370.84,4497 4490.84,4617 4610.84,4737 4730.84,4857 ; 3611.16,3797.32 3710.84,3897 3830.84,4017 3950.84,4137 4070.84,4257 4190.84,4377 4310.84,4497 4430.84,4617 4550.84,4737 4670.84,4857 4730.84,4917 ; 3611.16,3857.32 3650.84,3897 3770.84,4017 3890.84,4137 4010.84,4257 4130.84,4377 4250.84,4497 4370.84,4617 4490.84,4737 4610.84,4857 4730.84,4977 ; 3611.16,3917.32 3710.84,4017 3830.84,4137 3950.84,4257 4070.84,4377 4190.84,4497 4310.84,4617 4430.84,4737 4550.84,4857 4670.84,4977 4730.84,5037 ; 3611.16,3977.32 3650.84,4017 3770.84,4137 3890.84,4257 4010.84,4377 4130.84,4497 4250.84,4617 4370.84,4737 4490.84,4857 4610.84,4977 4730.84,5097 ; 3611.16,4037.32 3710.84,4137 3830.84,4257 3950.84,4377 4070.84,4497 4190.84,4617 4310.84,4737 4430.84,4857 4550.84,4977 4670.84,5097 4730.84,5157 ; 3611.16,4097.32 3650.84,4137 3770.84,4257 3890.84,4377 4010.84,4497 4130.84,4617 4250.84,4737 4370.84,4857 4490.84,4977 4610.84,5097 4730.84,5217 ; 3611.16,4157.32 3710.84,4257 3830.84,4377 3950.84,4497 4070.84,4617 4190.84,4737 4310.84,4857 4430.84,4977 4550.84,5097 4670.84,5217 ; 3611.16,4217.32 3650.84,4257 3770.84,4377 3890.84,4497 4010.84,4617 4130.84,4737 4250.84,4857 4370.84,4977 4490.84,5097 4610.84,5217 ; 3611.16,4277.32 3710.84,4377 3830.84,4497 3950.84,4617 4070.84,4737 4190.84,4857 4310.84,4977 4430.84,5097 4550.84,5217 ; 3611.16,4337.32 3650.84,4377 3770.84,4497 3890.84,4617 4010.84,4737 4130.84,4857 4250.84,4977 4370.84,5097 4490.84,5217 ; 3611.16,4397.32 3710.84,4497 3830.84,4617 3950.84,4737 4070.84,4857 4190.84,4977 4310.84,5097 4430.84,5217 ; 3611.16,4457.32 3650.84,4497 3770.84,4617 3890.84,4737 4010.84,4857 4130.84,4977 4250.84,5097 4370.84,5217 ; 3611.16,4517.32 3710.84,4617 3830.84,4737 3950.84,4857 4070.84,4977 4190.84,5097 4310.84,5217 ; 3611.16,4577.32 3650.84,4617 3770.84,4737 3890.84,4857 4010.84,4977 4130.84,5097 4250.84,5217 ; 3611.16,4637.32 3710.84,4737 3830.84,4857 3950.84,4977 4070.84,5097 4190.84,5217 ; 3611.16,4697.32 3650.84,4737 3770.84,4857 3890.84,4977 4010.84,5097 4130.84,5217 ; 3611.16,4757.32 3710.84,4857 3830.84,4977 3950.84,5097 4070.84,5217 ; 3611.16,4817.32 3650.84,4857 3770.84,4977 3890.84,5097 4010.84,5217 ; 3611.16,4877.32 3710.84,4977 3830.84,5097 3950.84,5217 ; 3611.16,4937.32 3650.84,4977 3770.84,5097 3890.84,5217 ; 3611.16,4997.32 3710.84,5097 3830.84,5217 ; 3611.16,5057.32 3650.84,5097 3770.84,5217 ; 3611.16,5117.32 3710.84,5217 ; 3611.16,5177.32 3650.84,5217 ; 3650.3,2105.14 4730.84,3185.68 ; 3650.84,3417 3770.84,3537 3890.84,3657 4010.84,3777 4130.84,3897 4250.84,4017 4370.84,4137 4490.84,4257 4610.84,4377 4730.84,4497 ; 3710.3,2105.14 4730.84,3125.68 ; 3710.84,3417 3830.84,3537 3950.84,3657 4070.84,3777 4190.84,3897 4310.84,4017 4430.84,4137 4550.84,4257 4670.84,4377 4730.84,4437 ; 3770.3,2105.14 4730.84,3065.68 ; 3770.84,3417 3890.84,3537 4010.84,3657 4130.84,3777 4250.84,3897 4370.84,4017 4490.84,4137 4610.84,4257 4730.84,4377 ; 3830.3,2105.14 4730.84,3005.68 ; 3830.84,3417 3950.84,3537 4070.84,3657 4190.84,3777 4310.84,3897 4430.84,4017 4550.84,4137 4670.84,4257 4730.84,4317 ; 3890.3,2105.14 4730.84,2945.68 ; 3890.84,3417 4010.84,3537 4130.84,3657 4250.84,3777 4370.84,3897 4490.84,4017 4610.84,4137 4730.84,4257 ; 3950.3,2105.14 4730.84,2885.68 ; 3950.84,3417 4070.84,3537 4190.84,3657 4310.84,3777 4430.84,3897 4550.84,4017 4670.84,4137 4730.84,4197 ; 4010.3,2105.14 4730.84,2825.68 ; 4010.84,3417 4130.84,3537 4250.84,3657 4370.84,3777 4490.84,3897 4610.84,4017 4730.84,4137 ; 4070.3,2105.14 4730.84,2765.68 ; 4070.84,3417 4190.84,3537 4310.84,3657 4430.84,3777 4550.84,3897 4670.84,4017 4730.84,4077 ; 4130.3,2105.14 4730.84,2705.68 ; 4130.84,3417 4250.84,3537 4370.84,3657 4490.84,3777 4610.84,3897 4730.84,4017 ; 4190.3,2105.14 4730.84,2645.68 ; 4190.84,3417 4310.84,3537 4430.84,3657 4550.84,3777 4670.84,3897 4730.84,3957 ; 4250.3,2105.14 4730.84,2585.68 ; 4250.84,3417 4370.84,3537 4490.84,3657 4610.84,3777 4730.84,3897 ; 4310.3,2105.14 4730.84,2525.68 ; 4310.84,3417 4430.84,3537 4550.84,3657 4670.84,3777 4730.84,3837 ; 4370.3,2105.14 4730.84,2465.68 ; 4370.84,3417 4490.84,3537 4610.84,3657 4730.84,3777 ; 4430.3,2105.14 4730.84,2405.68 ; 4430.84,3417 4550.84,3537 4670.84,3657 4730.84,3717 ; 4490.3,2105.14 4730.84,2345.68 ; 4490.84,3417 4610.84,3537 4730.84,3657 ; 4550.3,2105.14 4730.84,2285.68 ; 4550.84,3417 4670.84,3537 4730.84,3597 ; 4610.3,2105.14 4730.84,2225.68 ; 4610.84,3417 4730.84,3537 ; 4670.3,2105.14 4730.84,2165.68 ; 4670.84,3417 4730.84,3477
  lines w10: 47.08,-60.04 4130.58,-60.04 4130.58,1908.96 47.08,1908.96 47.08,-60.04
  lines w15: 82.08,3537 491.99,3537 1531.7,3537 2391.46,3537 3041.3,3537 3611.16,3537 4730.84,3537 ; 82.08,3657 491.99,3657 1531.7,3657 2391.46,3657 3041.3,3657 3611.16,3657 4730.84,3657 ; 82.08,3777 491.99,3777 1531.7,3777 2391.46,3777 3041.3,3777 3611.16,3777 4730.84,3777 ; 82.08,3897 491.99,3897 1531.7,3897 2391.46,3897 3041.3,3897 3611.16,3897 4730.84,3897 ; 82.08,4017 491.99,4017 1531.7,4017 2391.46,4017 3041.3,4017 3611.16,4017 4730.84,4017 ; 82.08,4137 491.99,4137 1531.7,4137 2391.46,4137 3041.3,4137 3611.16,4137 4730.84,4137 ; 82.08,4257 491.99,4257 1531.7,4257 2391.46,4257 3041.3,4257 3611.16,4257 4730.84,4257 ; 82.08,4377 491.99,4377 1531.7,4377 2391.46,4377 3041.3,4377 3611.16,4377 4730.84,4377 ; 82.08,4497 491.99,4497 1531.7,4497 2391.46,4497 3041.3,4497 3611.16,4497 4730.84,4497 ; 82.08,4617 491.99,4617 1531.7,4617 2391.46,4617 3041.3,4617 3611.16,4617 4730.84,4617 ; 82.08,4737 491.99,4737 1531.7,4737 2391.46,4737 3041.3,4737 3611.16,4737 4730.84,4737 ; 82.08,4857 491.99,4857 1531.7,4857 2391.46,4857 3041.3,4857 3611.16,4857 4730.84,4857 ; 82.08,4977 491.99,4977 1531.7,4977 2391.46,4977 3041.3,4977 3611.16,4977 4730.84,4977 ; 82.08,5097 491.99,5097 1531.7,5097 2391.46,5097 3041.3,5097 3611.16,5097 4730.84,5097 ; 82.08,5217 4730.84,5217 ; 491.99,5337 491.99,3417 ; 1531.7,5337 1531.7,3417 ; 2391.46,5337 2391.46,3417 ; 3041.3,5337 3041.3,3417 ; 3611.16,5337 3611.16,3417 ; 491.99,3417 82.08,3417 82.08,5337 4730.84,5337 4730.84,3417 3611.16,3417 ; 491.99,3417 1531.7,3417 ; 1531.7,3417 2391.46,3417 ; 2391.46,3417 3041.3,3417 ; 3041.3,3417 3611.16,3417 ; 82.08,2105.68 4730.84,2105.68 4730.84,3387.01 82.08,3387.01 82.08,2105.68
  text "Layer" at 142.08,5247 h60
  text "Name" at 551.99,5247 h60
  text "Material" at 1591.7,5247 h60
  text "Thickness" at 2451.47,5247 h60
  text "Constant" at 3101.3,5247 h60
  text "Board Layer Stack" at 3671.16,5247 h60
  text "1" at 142.08,5127 h60
  text "Top Overlay" at 551.99,5127 h60
  text "2" at 142.08,5007 h60
  text "Top Solder" at 551.99,5007 h60
  text "Solder Resist" at 1591.7,5007 h60
  text "0.40mil" at 2451.47,5007 h60
  text "3.5" at 3101.3,5007 h60
  text "3" at 142.08,4887 h60
  text "Top Layer" at 551.99,4887 h60
  text "Copper" at 1591.7,4887 h60
  text "1.40mil" at 2451.47,4887 h60
  text "4" at 142.08,4767 h60
  text "Dielectric 1" at 551.99,4767 h60
  text "FR-4" at 1591.7,4767 h60
  text "4.00mil" at 2451.47,4767 h60
  text "4.2" at 3101.3,4767 h60
  text "5" at 142.08,4647 h60
  text "Signal Layer 1" at 551.99,4647 h60
  text "Copper" at 1591.7,4647 h60
  text "0.70mil" at 2451.47,4647 h60
  text "6" at 142.08,4527 h60
  text "Dielectric 3" at 551.99,4527 h60
  text "9.00mil" at 2451.47,4527 h60
  text "4.2" at 3101.3,4527 h60
  text "7" at 142.08,4407 h60
  text "Internal Plane 1" at 551.99,4407 h60
  text "Copper" at 1591.7,4407 h60
  text "0.70mil" at 2451.47,4407 h60
  text "8" at 142.08,4287 h60
  text "Dielectric 4" at 551.99,4287 h60
  text "30.00mil" at 2451.47,4287 h60
  text "4.2" at 3101.3,4287 h60
  text "9" at 142.08,4167 h60
  text "Internal Plane 2" at 551.99,4167 h60
  text "Copper" at 1591.7,4167 h60
  text "0.70mil" at 2451.47,4167 h60
  text "10" at 142.08,4047 h60
  text "Dielectric 5" at 551.99,4047 h60
  text "9.00mil" at 2451.47,4047 h60
  text "4.2" at 3101.3,4047 h60
  text "11" at 142.08,3927 h60
  text "Signal Layer 2" at 551.99,3927 h60
  text "Copper" at 1591.7,3927 h60
  text "0.70mil" at 2451.47,3927 h60
  text "12" at 142.08,3807 h60
  text "Dielectric 2" at 551.99,3807 h60
  text "4.00mil" at 2451.47,3807 h60
  text "4.2" at 3101.3,3807 h60
  text "13" at 142.08,3687 h60
  text "Bottom Layer" at 551.99,3687 h60
  text "Copper" at 1591.7,3687 h60
  text "1.40mil" at 2451.47,3687 h60
  text "14" at 142.08,3567 h60
  text "Bottom Solder" at 551.99,3567 h60
  text "Solder Resist" at 1591.7,3567 h60
  text "0.40mil" at 2451.47,3567 h60
  text "3.5" at 3101.3,3567 h60
  text "15" at 142.08,3447 h60
  text "Bottom Overlay" at 551.99,3447 h60

## Other copper
Top Layer:
  text "Top Layer" at 3796.39,4888.32 h60
  text "100 Ohm - Differential" at 228.89,3219.75 h60
  text "Top layer and Mid layer 1 - 6mil parallel traces over ground plane 1" at 397.44,3089.25 h60
  text "Bottom layer and Mid layer 2 - 6mil parallel traces over ground plane 2" at 397.44,2953.32 h60
  text "50 Ohm - single ended" at 212.58,2817.39 h60
  text "Mid layer 1 - 12mil traces" at 424.63,2659.71 h60
  text "Mid layer 2 - 12mil traces" at 416.46,2537.15 h60
Signal Layer 1:
  text "Mid Layer 1" at 3795.57,4640.18 h60
Signal Layer 2:
  text "Mid Layer 2" at 3768.39,3917.02 h60
Bottom Layer:
  text "Bottom Layer" at 3812.71,3675.8 h60
Internal Plane 1 (plane layer: these items are gaps in the copper):
  text "Ground Plane 1 (Gnd)" at 3610.91,4405.09 h60
Internal Plane 2 (plane layer: these items are gaps in the copper):
  text "Ground Plane 2 (Gnd)" at 3610.91,4149.54 h60

## Silkscreen, mask and mechanical layers (free items; w line width, h text height)
Top Overlay:
  text "Top Silk" at 3893.65,5122.82 h60
  text "1" at 435.47,1807 h60
  text "1" at 1133.18,1178.17 h60
  text "SPT3G LC Test Board Rev0" at 893.69,76.5 h60 r90
  text "Amy Bender" at 958.67,75.72 h60 r90
  text "adamjohngilbert@gmail.com" at 1027.58,72.89 h60 r90
Bottom Overlay:
  text "Bottom Silk" at 3861.03,3442.68 h60
  text "1" at 662.71,643.62 h60 r180
  text "SPT3G LC Test Board Rev0" at 4045.71,602.8 h60 r270
  text "Amy Bender" at 3980.73,602.02 h60 r270
  text "adamjohngilbert@gmail.com" at 3911.82,599.19 h60 r270
  text "1" at 1350.07,18.15 h60 r180
Mechanical 2:
  lines w10: 1897.53,123.23 1917.53,63.23 ; 1897.53,1735.23 1917.53,1795.23 ; 1907.53,63.23 1927.53,63.23 ; 1907.53,1795.23 1927.53,1795.23 ; 1917.53,653.32 1917.53,63.23 ; 1917.53,1205.15 1917.53,1795.23 ; 1937.53,123.23 1917.53,63.23 ; 1937.53,1735.23 1917.53,1795.23
  text "1732 (mil)" at 1953.52,663.32 h60 r90

## Dimensions
494.25,624.61 to 1180.23,-25 on Mechanical 2
1180.23,-25 to 494.25,624.61 on Mechanical 2
2031.36,58.96 to 1725.51,-25 on Mechanical 2
47.08,-60.04 to 2031.36,58.96 on Mechanical 2